# Altium PCB cereal-pcb.PcbDoc (part 1 of 2)
Units mil, origin at the board's own origin, x right, y up, seen from the top; angles counter-clockwise.
Board outline 894.17 x 955.43 mil, 4 copper layers (Top Layer, Signal Layer 1, Signal Layer 2, Bottom Layer), stack 22.048 mil thick; 42 components, 42 nets, 225 pads, 75 vias.
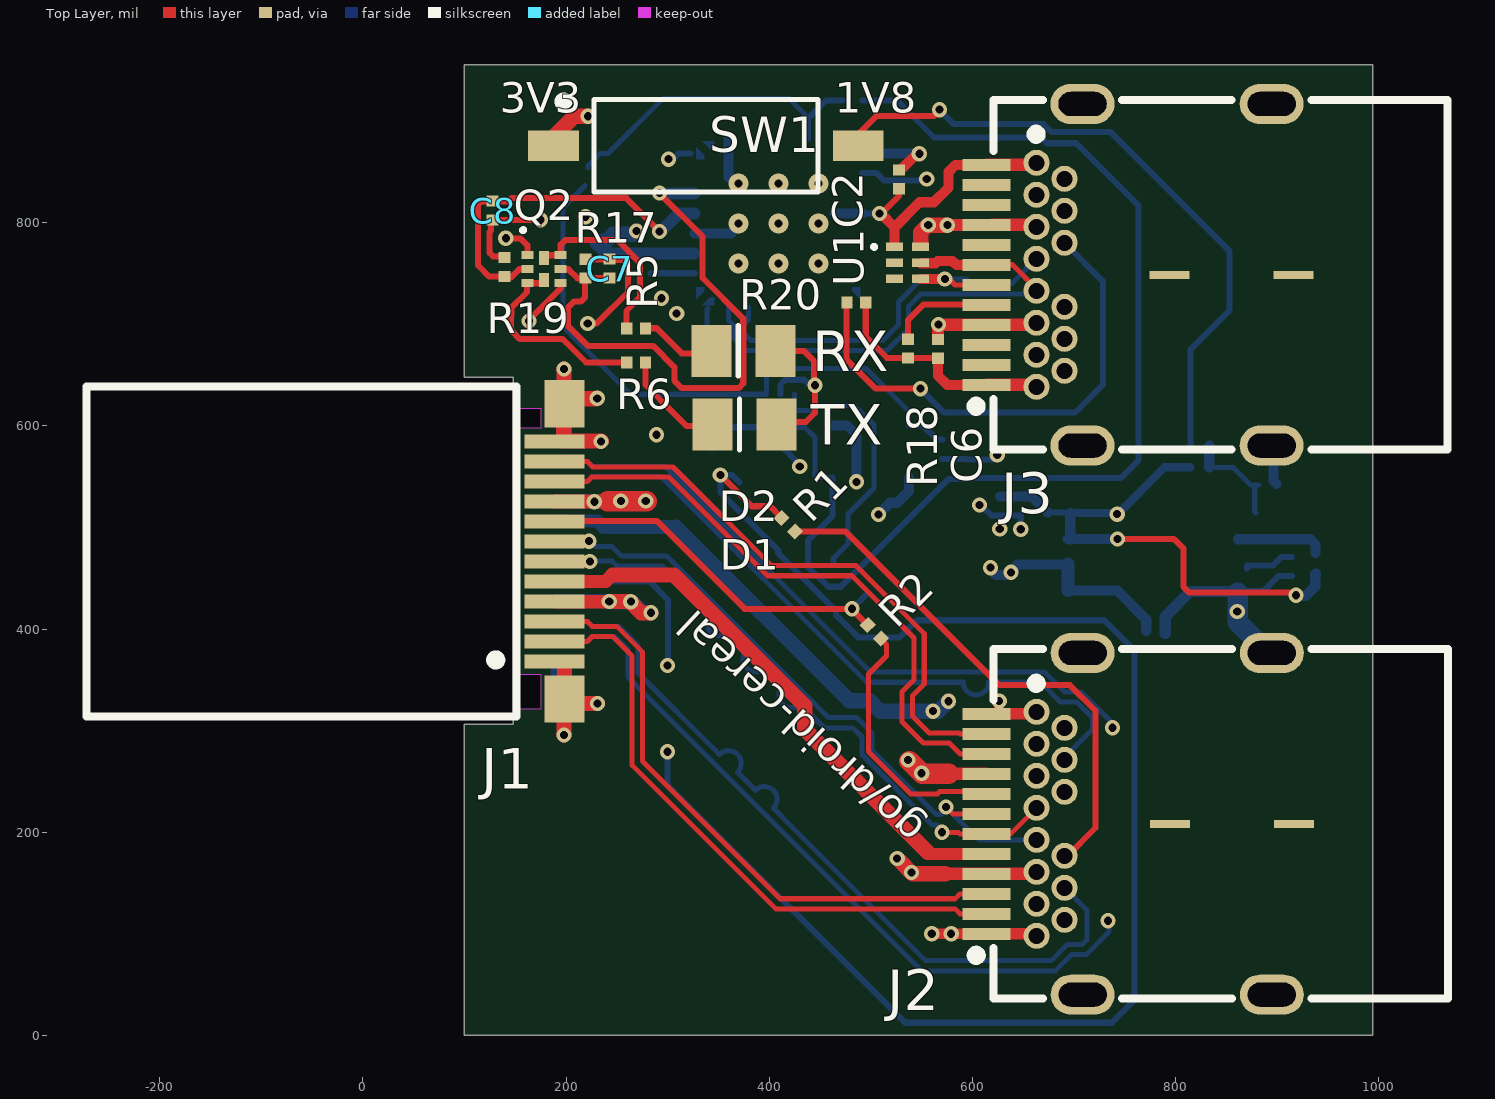
[diagram p0: Top Layer view]
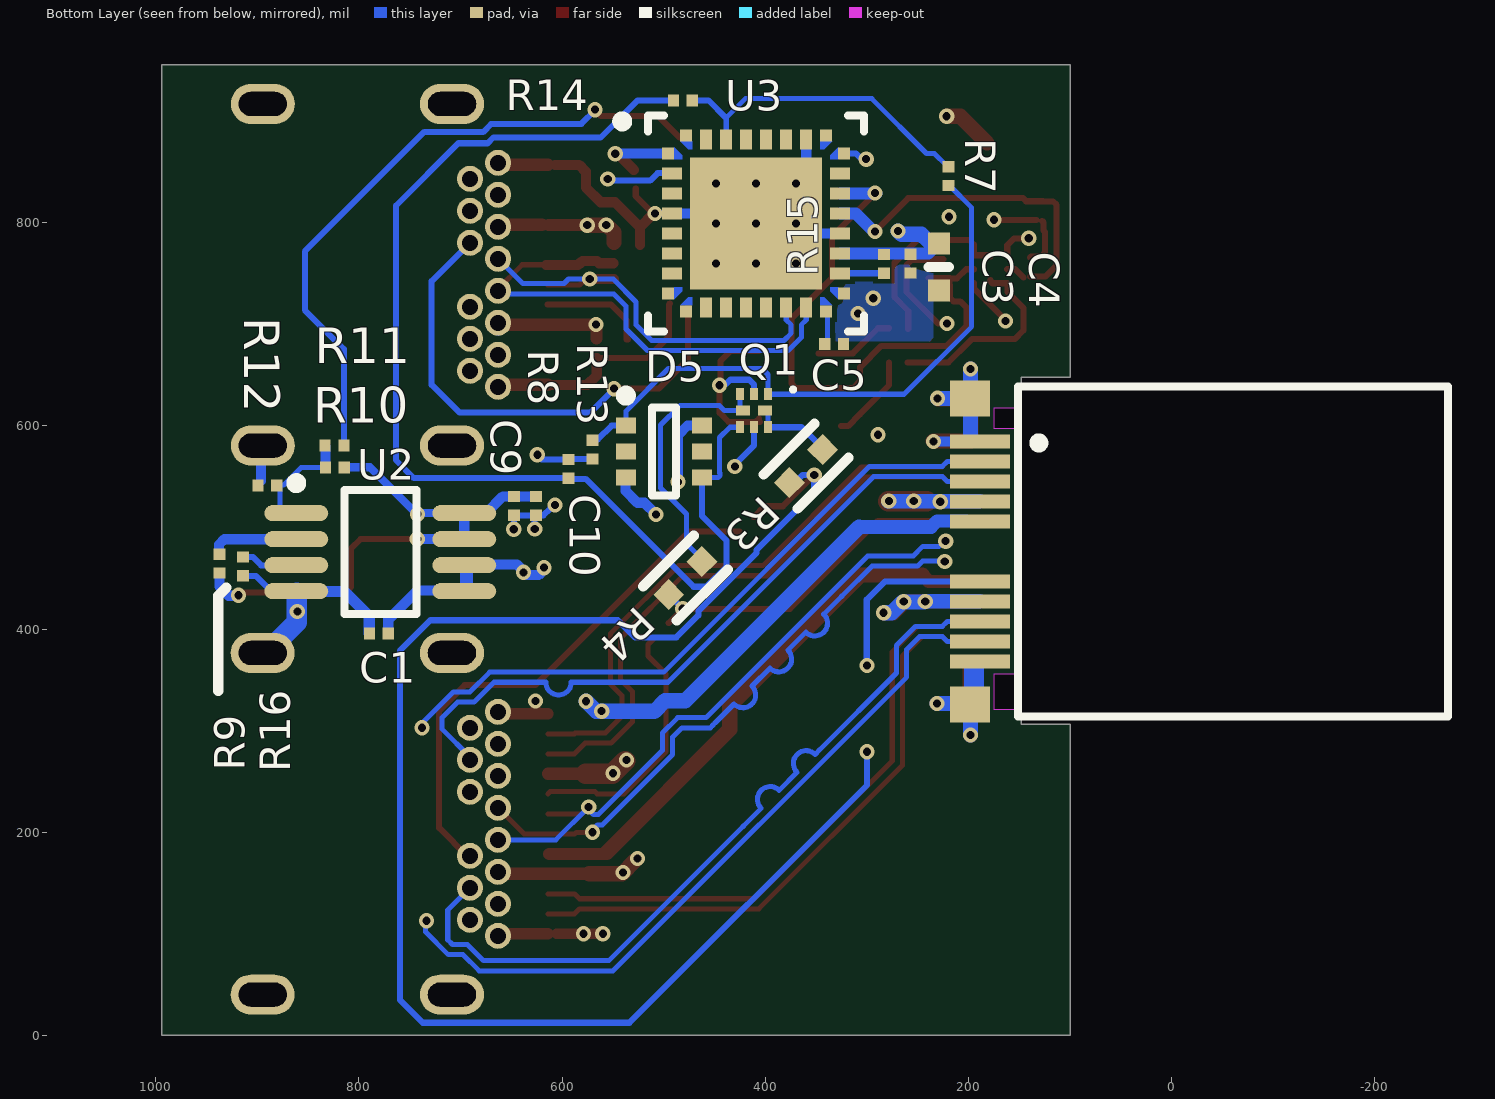
[diagram p1: Bottom Layer view, seen from below]
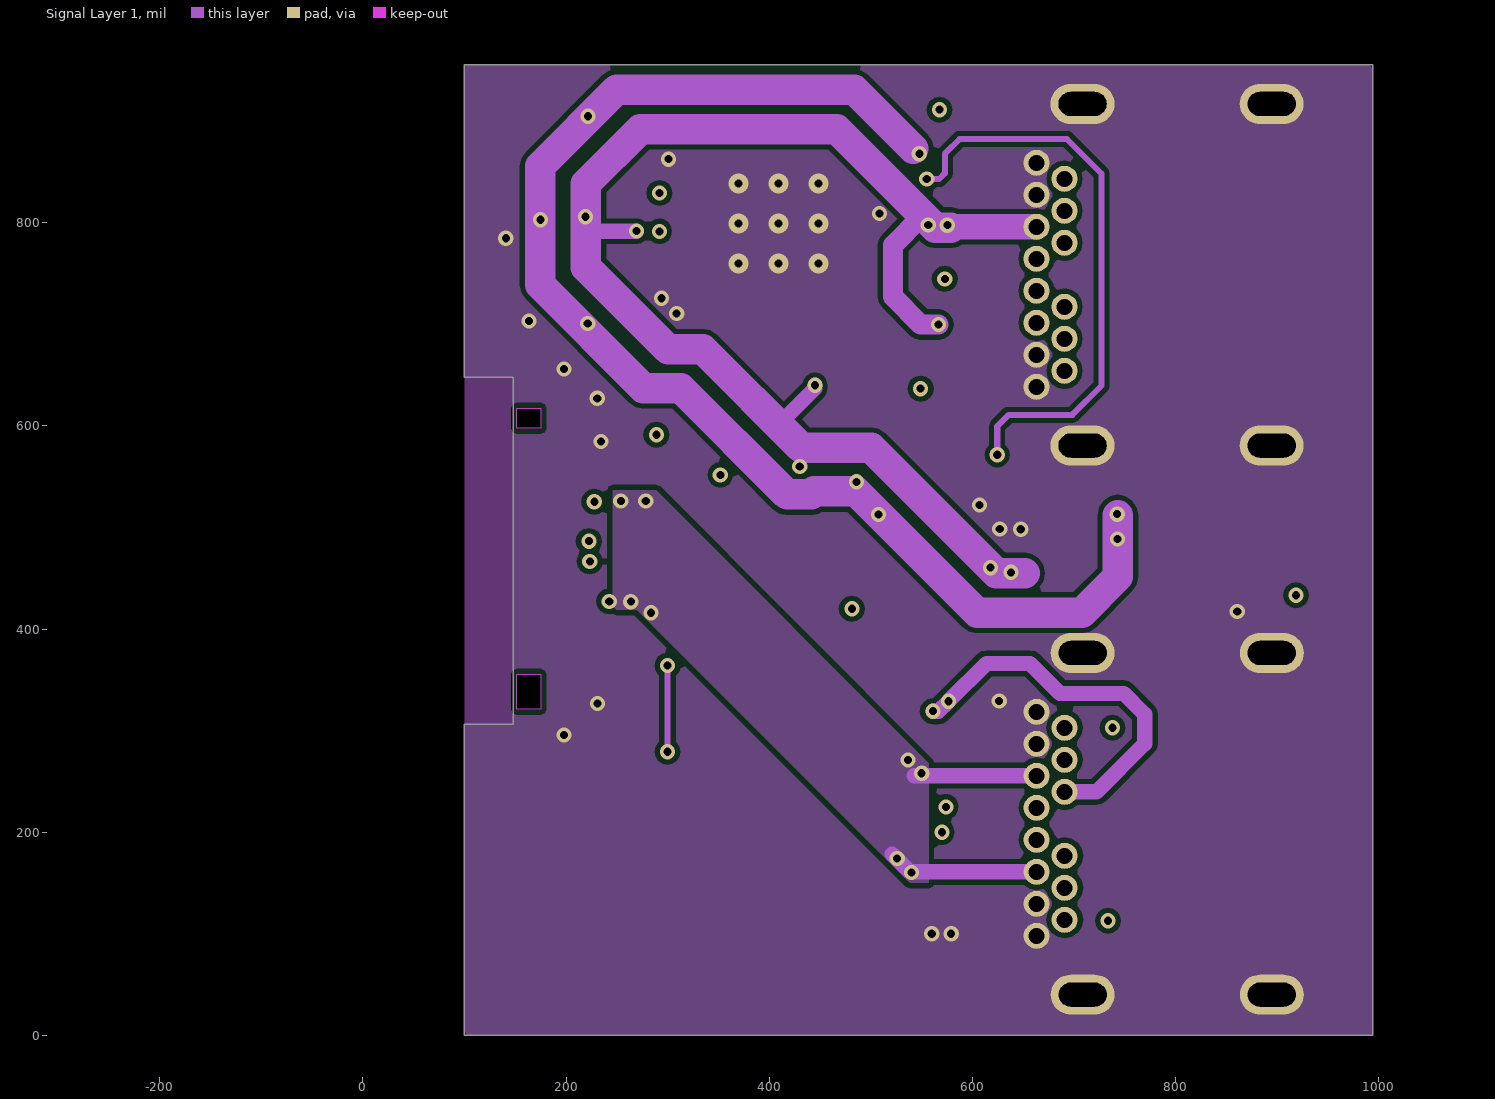
[diagram p2: Signal Layer 1]
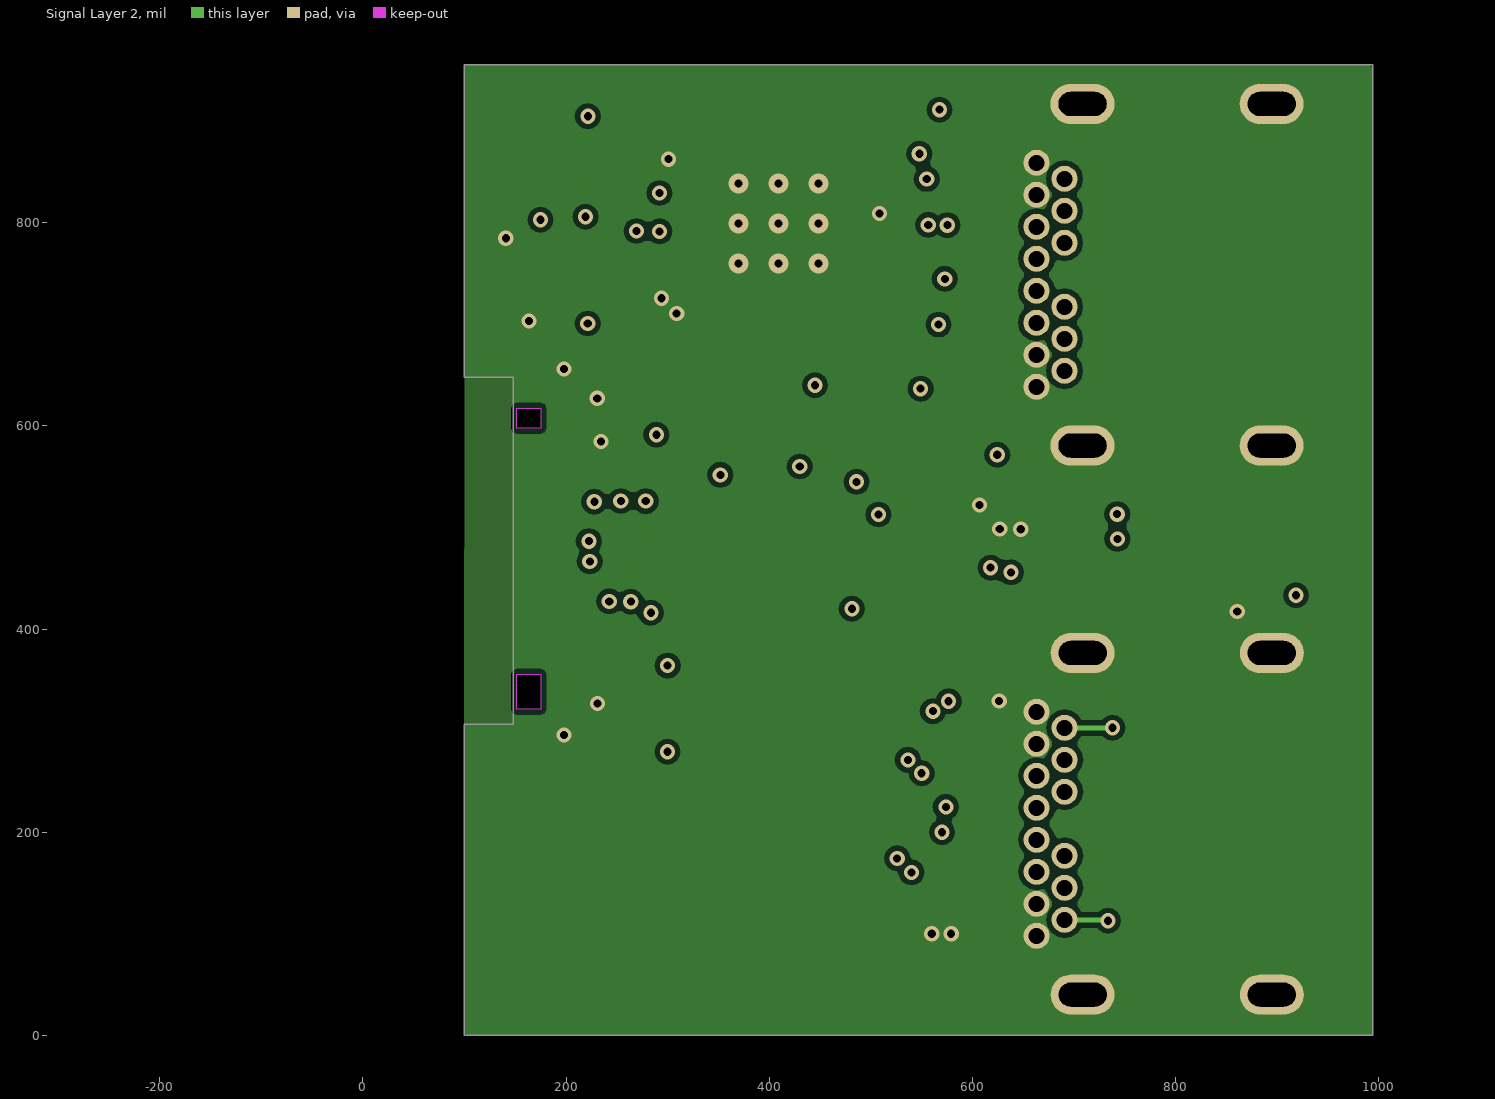
[diagram p3: Signal Layer 2]

## Layer stack, top to bottom
Top Solder: solder mask 0.4, Solder Resist, Dk 3.5
Top Layer: signal copper 1.378
Dielectric 1: prepreg 4.331, FR-4, Dk 4.2
Signal Layer 1: signal copper 1.378
FR-4: core 7.874, Dk 4.2
Signal Layer 2: signal copper 1.378
Dielectric 2: prepreg 4.331, Dk 4.2
Bottom Layer: signal copper 1.378
Bottom Solder: solder mask 0.4, Solder Resist, Dk 3.5

## Board outline
100,0 100,306.31 148.18,306.31 148.18,647.76 100,647.76 100,955.43 994.17,955.43 994.17,0

## Design rules (kind name [scope] priority, off if disabled: settings)
Clearance [All] p1: gap=5 ignorepadtopadclearanceinfootprint=FALSE
DiffPairsRouting [All] p1: maxlimit=10 minlimit=4 mostfreqgap=5 toplayer_minwidth=4 toplayer_maxwidth=15 toplayer_prefwidth=5 midlayer1_minwidth=4 midlayer1_maxwidth=15 midlayer1_prefwidth=5 midlayer2_minwidth=4 midlayer2_maxwidth=15 midlayer2_prefwidth=5 bottomlayer_minwidth=4 bottomlayer_maxwidth=15 bottomlayer_prefwidth=5 maxuncoupledlength=500
MinimumSolderMaskSliver [All] p1: minsoldermaskwidth=1
PolygonConnect [All] p1: connectstyle=Direct reliefconductorwidth=10 reliefentries=4 polygonreliefangle="90 Angle" airgapwidth=10
RoutingVias [All] p1: holewidth=28 width=50 viastyle="Through Hole" minholewidth=28 minwidth=50 maxholewidth=28 maxwidth=50
SilkToSilkClearance [All] p1: silktosilkclearance=1
SilkToSolderMaskClearance [IsPad] p1: minsilkscreentomaskgap=1 clearancetoexposedcopper=TRUE
SolderMaskExpansion [All] p1: expansion=4 istentingtop=FALSE
Width [All] p1: maxlimit=40 minlimit=4 preferedwidth=6
26 further rules are at their usual default settings.

## Classes and differential pairs
differential pair USBC_HS: +USBC_HS_P -USBC_HS_N
differential pair USB_FT_HS: +USB_FT_HS_P -USB_FT_HS_N
differential pair SSTX2: +SSTX2_P -SSTX2_N
differential pair SSTX1: +SSTX1_P -SSTX1_N
differential pair SSRX2: +SSRX2_P -SSRX2_N
differential pair SSRX1: +SSRX1_P -SSRX1_N

## Components (designator, comment, footprint, x,y, rotation, side; value= is the part's Value field where it differs from the comment)
C1 "1µF" SMD-0201C 780.39,395.57 r0 bottom
C2 "1µF" SMD-0201C 527.48,842.75 r270 top
C3 "0.10µF" SMD-0201C 257.16,759.62 r270 bottom
C4 "4.7µF" SMD-0402C 229.06,756.29 r180 bottom
C5 "0.10µF" SMD-0201C 332.17,680.81 r180 bottom
C6 "10000pF" SMD-0201C 565.93,675.89 r270 top
C7 "2.2µF" SMD-0201C 242.86,754.88 r270 top
C8 "2.2µF" SMD-0201C 127.66,812 r90 top
C9 "1µF" SMD-0201C 647.51,521.35 r270 bottom
C10 "1µF" SMD-0201C 625.52,521.3 r270 bottom
D1 "LTST-C171GKT" 0805 375.79,601.32 r180 top
D2 "LTST-C171KSKT" 0805 374.51,673.91 r180 top
D5 "MBD54DWT1" ONSC-SOT-363-6-419B-02_W_V 499.82,574.68 r180 bottom
J1 "632712000011" 632712000011 -26.7,476.47 r270 top
J2 "632723100011" 632723100011 835.8,208.37 r90 top
J3 "632723100011" 632723100011 835.69,748.76 r90 top
Q1 "PMDXB600UNEZ" NXP-SOT1216_N 411.05,615.11 r270 bottom
Q2 "PMDXB600UNEZ" NXP-SOT1216_N 178.33,754.22 r0 top
R1 "0.0" SMD-0201-RES 418.71,502.66 r315 top
R2 "0.0" SMD-0201-RES 503.5,397.37 r135 top
R3 "62" SMD-0402-RES 359.94,560.35 r225 bottom
R4 "62" SMD-0402-RES 478.75,450.18 r225 bottom
R5 "1k" SMD-0201-RES 268.92,696.1 r0 top
R6 "270" SMD-0201-RES 268.95,662.43 r0 top
R7 "0.0" SMD-0201-RES 219.93,845.81 r90 bottom
R8 "0.0" SMD-0201-RES 593.81,557.8 r90 bottom
R9 "53.6k" SMD-0201-RES 937.33,464.35 r270 bottom
R10 "53.6k" SMD-0201-RES 823.77,559.25 r180 bottom
R11 "22.1k" SMD-0201-RES 824.01,580.71 r180 bottom
R12 "30.1k" SMD-0201-RES 890.03,541.45 r180 bottom
R13 "0.0" SMD-0201-RES 569.98,576.54 r270 bottom
R14 "0.0" SMD-0201-RES 481.13,920.44 r180 bottom
R15 "30.1k" SMD-0201-RES 283.35,759.46 r270 bottom
R16 "0.0" SMD-0201-RES 914.32,461.84 r90 bottom
R17 "30.1k" SMD-0201-RES 219.28,754.83 r90 top
R18 "5.1k" SMD-0201-RES 536.52,676.06 r90 top
R19 "30.1k" SMD-0201-RES 139.47,756.44 r90 top
R20 "5.1k" SMD-0201-RES 485.7,721.66 r180 top
SW1 "416131160801" 416131160801 337.56,875.87 r270 top
U1 "ESDR0502NMUTAG" ONSC-UDFN-6-517AA-01_V 536.06,760.49 r0 top
U2 "TPS77401DGK" TI-DGK8_N 778.98,475.7 r180 bottom
U3 "FT232RQ-Reel" PQFN5X5-32_V 408.95,799.32 r180 bottom

## Footprints (in the part's own frame and the unit in brackets; to place one, negate y for a bottom-side part, rotate by r counter-clockwise, add the part's x,y. Pads: shape width x height; smd on the part's side, far side on the other; paste and mask are expansions set on the pad)
0805 [mm]
  rect 1x1.3 smd: 1(-0.8,0) 2(0.8,0)
  silkscreen extent 0.13,-0.64 0.13,0.64, body extent -1.07,-0.64 1.07,0.76, height 0.7
416131160801 [mm] "01p, 1.27mm Pitch, Horizontal, HP Type, SMT, flat Actuator, black, with Tape, T&R"
  rect 0.76x1.27 smd: 1(0,-3.81) 2(0,3.81)
  silkscreen extent -1.2,-3.66 1.15,2.8, body extent -1.15,-4 1.16,4, height 3.3
632712000011 [mm] "USB 3.1 Type C Plug Horizontal SMT"
  rect 0.35x1.5 smd: A1(2.75,5.475) A2(2.25,5.475) A3(1.75,5.475) A4(1.25,5.475) A5(0.75,5.475) A6(0.25,5.475) A7(-0.25,5.475) A8(-0.75,5.475) A9(-1.25,5.475) A10(-1.75,5.475) A11(-2.25,5.475) A12(-2.75,5.475)
  rect 0.35x1.5 smd far side: B1(-2.75,5.475) B2(-2.25,5.475) B3(-1.75,5.475) B4(-1.25,5.475) B5(-0.75,5.475) B8(0.75,5.475) B9(1.25,5.475) B10(1.75,5.475) B11(2.25,5.475) B12(2.75,5.475)
  rect 0.9x1 smd far side: Shell(-3.825,5.725) Shell(3.825,5.725)
  rect 1.18x1 smd: Shell(-3.69,5.725) Shell(3.69,5.725)
  Keep-Out Layer board cut-out: -3.08,5.125 -3.08,4.525 -3.58,4.525 -3.58,5.125
  Keep-Out Layer board cut-out: 3.945,5.125 3.945,4.525 3.075,4.525 3.075,5.125
  silkscreen extent -4.13,-6.23 4.13,4.52, body extent -5.13,-7.18 5.12,6.22, height 1.9
632723100011 [mm] "USB 3.1 Type C Receptacle Horizontal THR"
  rect 0.3x1.2 smd: A1(-2.75,5.635) A2(-2.25,5.635) A3(-1.75,5.635) A4(-1.25,5.635) A5(-0.75,5.635) A6(-0.25,5.635) A7(0.25,5.635) A8(0.75,5.635) A9(1.25,5.635) A10(1.75,5.635) A11(2.25,5.635) A12(2.75,5.635)
  round 0.65 hole 0.4: B1(2.8,4.385) B2(2.4,3.685) B3(1.6,3.685) B4(1.2,4.385) B5(0.8,3.685) B6(0.4,4.385) B7(-0.4,4.385) B8(-0.8,3.685) B9(-1.2,4.385) B10(-1.6,3.685) B11(-2.4,3.685) B12(-2.8,4.385) Shell(-2,4.385) Shell(2,4.385)
  oval 1x1.6 hole 0.6 slot 1.2 at 90 deg: Shell(-4.27,-1.495) Shell(-4.27,3.235) Shell(4.27,-1.495) Shell(4.27,3.235)
  rect 0.2x1 smd: ""(0,1.055) ""(0,-2.045)
  silkscreen extent -4.37,-5.89 4.37,6.01, body extent -4.37,-5.89 4.37,5.9, height 3.05
NXP-SOT1216_N [mm] "SON, 6-Leads, Body 1.15x1.05mm, Pitch 0.35mm, 2X Thermal Pad 0.35x0.25mm, IPC Medium Density"
  rect 0.3x0.2 smd: 1(-0.417,0.35) 2(-0.417,0) 3(-0.417,-0.35) 4(0.418,-0.35) 5(0.418,0) 6(0.418,0.35)
  rect 0.25x0.35 smd: 7(0,0.275) 8(0,-0.275)
  silkscreen extent -0.57,0.93 -0.47,1.02, body extent -0.52,-0.57 0.53,0.58, height 0.4
ONSC-SOT-363-6-419B-02_W_V [mm] "SOT23, 6-Leads, Body 2x1.25mm, Pitch 0.65mm"
  rect 0.5x0.4 smd: 1(-0.95,0.65) 2(-0.95,0) 3(-0.95,-0.65) 4(0.95,-0.65) 5(0.95,0) 6(0.95,0.65)
  silkscreen extent -1.08,-1.1 0.3,1.52, body extent -0.63,-1 0.63,1, height 1.1
ONSC-UDFN-6-517AA-01_V [mm] "SON, 6-Leads, Body 1.2x1mm, Pitch 0.4mm"
  rect 0.42x0.22 smd: 1(-0.325,0.4) 2(-0.325,0) 3(-0.325,-0.4) 4(0.325,-0.4) 5(0.325,0) 6(0.325,0.4)
  silkscreen extent -0.88,0.35 -0.78,0.45, body extent -0.5,-0.6 0.5,0.6, height 0.55
PQFN5X5-32_V [mm] "QFN, 32-Leads, Body 5x5mm, Pitch 0.5mm, Thermal Pad 3.3x3.3mm, FTDI Recommended"
  rect 0.3x0.3 smd paste-0.15 mask-0.15: 1(-2.2,1.75) 8(-2.2,-1.75) 9(-1.75,-2.2) 16(1.75,-2.2) 17(2.2,-1.75) 24(2.2,1.75) 25(1.75,2.2) 32(-1.75,2.2)
  rect 0.5x0.3 smd paste-0.15 mask+0.06: 2(-2.1,1.25) 3(-2.1,0.75) 4(-2.1,0.25) 5(-2.1,-0.25) 6(-2.1,-0.75) 7(-2.1,-1.25) 18(2.1,-1.25) 19(2.1,-0.75) 20(2.1,-0.25) 21(2.1,0.25) 22(2.1,0.75) 23(2.1,1.25)
  rect 0.3x0.5 smd paste-0.15 mask+0.06: 10(-1.25,-2.1) 11(-0.75,-2.1) 12(-0.25,-2.1) 13(0.25,-2.1) 14(0.75,-2.1) 15(1.25,-2.1) 26(1.25,2.1) 27(0.75,2.1) 28(0.25,2.1) 29(-0.25,2.1) 30(-0.75,2.1) 31(-1.25,2.1)
  rect 3.3x3.3 smd paste-1.65 mask+0.06: 33(0,0)
  Top Layer region: 1.6,-1.85 1.6,-2.05 1.9,-2.05 1.7,-1.85
  Top Layer region: -1.6,2.05 -1.6,1.85 -1.7,1.85 -1.9,2.05
  Top Layer region: 1.6,2.05 1.6,1.85 1.7,1.85 1.9,2.05
  Top Layer region: -1.6,-2.05 -1.6,-1.85 -1.7,-1.85 -1.9,-2.05
  Top Layer region: -2.05,1.6 -1.85,1.6 -1.85,1.7 -2.05,1.9
  Top Layer region: 2.05,1.6 1.85,1.6 1.85,1.7 2.05,1.9
  Top Layer region: 2.05,-1.6 1.85,-1.6 1.85,-1.7 2.05,-1.9
  Top Layer region: -2.05,-1.6 -1.85,-1.6 -1.85,-1.7 -2.05,-1.9
  silkscreen extent -3.47,-2.7 2.7,2.7, body extent -2.55,-2.55 2.55,2.55, height 1
SMD-0201-RES [mm] "SMD-0201-RES"
  rect 0.28x0.3 smd: 1(-0.235,0) 2(0.235,0)
  body extent -0.3,-0.15 0.3,0.15, height 0.3
SMD-0201C [mm] "SMD-0201"
  rect 0.28x0.3 smd: 1(-0.235,0) 2(0.235,0)
  body extent -0.3,-0.15 0.3,0.15, height 0.3
SMD-0402-RES [mm]
  rect 0.55x0.55 smd: 1(0,0.584) 2(0,-0.584)
  silkscreen extent -0.6,-0.9 0.6,0.9, body extent -0.27,-0.57 0.28,0.58, height 0.41
SMD-0402C [mm]
  rect 0.55x0.55 smd: 1(0,0.584) 2(0,-0.584)
  silkscreen extent -0.25,0 0.25,0, body extent -0.25,-0.51 0.25,0.51, height 0.51
TI-DGK8_N [mm] "SOP, 8-Leads, Body 3x3mm, Pitch 0.65mm, IPC Medium Density"
  oval 1.6x0.4 smd: 1(-2.1,0.975) 2(-2.1,0.325) 3(-2.1,-0.325) 4(-2.1,-0.975) 5(2.1,-0.975) 6(2.1,-0.325) 7(2.1,0.325) 8(2.1,0.975)
  silkscreen extent -2.23,-1.55 0.9,1.85, body extent -1.55,-1.55 1.55,1.55, height 1.1

## Part data
C1 C2 C9 C10: library part GRM033R60J105MEA2D, "CAP CER 1UF 6.3V X5R 0201", Digi-Key Part Number=490-7229-1-ND, Manufacturer="Murata Electronics North America", Operating Temperature="-55°C ~ 85°C", Package / Case="0.024\" L x 0.012\" W (0.60mm x 0.30mm)", Ratings=-, Temperature Coefficient=X5R, Tolerance=±20%, Voltage=6.3V, @ qty=0, Applications="General Purpose", Datasheets=http://www.murata.com/~/media/webrenewal/support/library/catalog/products/capacitor/mlcc/c02e.pdf, Factory Stock=0, Failure Rate="Surface Mount, MLCC", Features="Derating Recommended", Height - Seated (Max)="0.013\" (0.33mm)", Image=//media.digikey.com/Renders/Murata%20Renders/ZRB-SERIES-0402.jpg, Lead Spacing=-, Minimum Quantity=1, Mounting Type="0201 (0603 Metric)", Packaging="Cut Tape (CT)", Part Number=GRM033R60J105MEA2D, Part Status=Active, Quantity Available=223818, Series=GRM, Size / Dimension=-, Thickness (Max)=-, Unit Price (USD)=0.12
C3 C5: library part GRM033R61A104KE15D, "CAP CER 0.1UF 10V X5R 0201", Digi-Key Part Number=490-5881-1-ND, Manufacturer="Murata Electronics North America", Operating Temperature="-55°C ~ 85°C", Package / Case="0.024\" L x 0.012\" W (0.60mm x 0.30mm)", Ratings=-, Temperature Coefficient=X5R, Tolerance=±10%, Voltage=10V, @ qty=0, Applications="General Purpose", Datasheets=http://www.murata.com/~/media/webrenewal/support/library/catalog/products/capacitor/mlcc/c02e.pdf, Factory Stock=0, Failure Rate="Surface Mount, MLCC", Features=-, Height - Seated (Max)="0.013\" (0.33mm)", Image=//media.digikey.com/Renders/Murata%20Renders/ZRB-SERIES-0402.jpg, Lead Spacing=-, Minimum Quantity=1, Mounting Type="0201 (0603 Metric)", Packaging="Cut Tape (CT)", Part Number=GRM033R61A104KE15D, Part Status=Active, Quantity Available=6540866, Series=GRM, Size / Dimension=-, Thickness (Max)=-, Unit Price (USD)=0.1
C4: library part GRM153R60G475ME15D, "CAP CER 4.7UF 4V X5R 0402", Digi-Key Part Number=490-13231-1-ND, Manufacturer="Murata Electronics North America", Operating Temperature="-55°C ~ 85°C", Package / Case="0402 (1005 Metric)", Ratings=-, Temperature Coefficient=X5R, Tolerance=±20%, Voltage=4V, @ qty=0, Applications="General Purpose", Datasheets=http://psearch.en.murata.com/capacitor/product/GRM153R60G475ME15%23.pdf, Factory Stock=0, Features=-, Height - Seated (Max)=-, Image=//media.digikey.com/Renders/Murata%20Renders/ZRB-SERIES-0402.jpg, Lead Spacing=-, Lead Style=-, Minimum Quantity=1, Mounting Type="Surface Mount, MLCC", Packaging="Cut Tape (CT)", Part Number=GRM153R60G475ME15D, Part Status=Active, Quantity Available=9100, Series=GRM, Size / Dimension="0.039\" L x 0.020\" W (1.00mm x 0.50mm)", Thickness (Max)="0.013\" (0.33mm)", Unit Price (USD)=0.27
C6: library part GRM033R61A103KA01J, "CAP CER 10000PF 10V X5R 0201", Digi-Key Part Number=490-8156-1-ND, Manufacturer="Murata Electronics North America", Operating Temperature="-55°C ~ 85°C", Package / Case="0.024\" L x 0.012\" W (0.60mm x 0.30mm)", Ratings=-, Temperature Coefficient=X5R, Tolerance=±10%, Voltage=10V, @ qty=0, Applications="General Purpose", Datasheets=http://www.murata.com/~/media/webrenewal/support/library/catalog/products/capacitor/mlcc/c02e.pdf, Factory Stock=0, Failure Rate="Surface Mount, MLCC", Features=-, Height - Seated (Max)="0.013\" (0.33mm)", Image=//media.digikey.com/Renders/Murata%20Renders/ZRB-SERIES-0402.jpg, Lead Spacing=-, Minimum Quantity=1, Mounting Type="0201 (0603 Metric)", Packaging="Cut Tape (CT)", Part Number=GRM033R61A103KA01J, Part Status=Active, Quantity Available=134975, Series=GRM, Size / Dimension=-, Thickness (Max)=-, Unit Price (USD)=0.1
C7 C8: library part GRM033R61A225KE47D, "CAP CER 2.2UF 10V X5R 0201", Digi-Key Part Number=490-13227-1-ND, Manufacturer="Murata Electronics North America", Operating Temperature="-55°C ~ 85°C", Package / Case="0.024\" L x 0.012\" W (0.60mm x 0.30mm)", Ratings=-, Temperature Coefficient=X5R, Tolerance=±10%, Voltage=10V, @ qty=0, Applications="General Purpose", Datasheets=http://www.murata.com/~/media/webrenewal/support/library/catalog/products/capacitor/mlcc/c02e.pdf, Factory Stock=0, Failure Rate="Surface Mount, MLCC", Features="Derating Recommended", Height - Seated (Max)="0.015\" (0.39mm)", Image=//media.digikey.com/Renders/Murata%20Renders/ZRB-SERIES-0402.jpg, Lead Spacing=-, Minimum Quantity=1, Mounting Type="0201 (0603 Metric)", Packaging="Cut Tape (CT)", Part Number=GRM033R61A225KE47D, Part Status=Active, Quantity Available=8, Series=GRM, Size / Dimension=-, Thickness (Max)=-, Unit Price (USD)=0.28
D1: "LED", Color=Green
D2: "LED", Color=Yellow
D5: "Dual Schottky Barrier Diodes, 6-Pin SOT-363, Tape and Reel", Manufacturer="On Semiconductor", Supplier Part Number 1=MBD54DWT1OSCT-ND, ComponentLink1Description="Manufacturer URL", ComponentLink1URL=http://www.onsemi.com/, ComponentLink2Description=Datasheet, ComponentLink2URL=http://www.onsemi.cn/pub_link/Collateral/MBD54DWT1-D.PDF, ComponentLink3Description="Package Specification", ComponentLink3URL=http://www.onsemi.com/pub_link/Collateral/NTJD4001N-D.PDF, Configuration=Dual, DatasheetVersion="Rev. 7", IFSM Max (A)=0.6, Mounting Technology="Surface Mount", PackageDescription="6-Pin Small Outline Transistor, Body 2 x 1.25 mm, Pitch 0.65 mm", PackageReference=SOT-363-6-419B-02_W, PackageVersion="Rev. W, 01/2006", Packing="Tape and Reel", PartNumber=MBD54DWT1, RoHS=FALSE, Supplier 1=Digi-Key, trr Max (ns)=5
J1: "USB 3.1 Type C Plug Horizontal SMT WR-COM", ComponentLink1Description=Manufacturer, ComponentLink1URL=http://www.we-online.de, ComponentLink2Description=Datasheet, ComponentLink2URL=http://katalog.we-online.de/em/datasheet/632712000011.pdf, Construction=SMT, Gender=Plug, Interface Type="Type C", Part Number=632712000011, Published Date="April 2017", Publisher="Wurth Elektronik", Sub-Family="USB 3.1", Type=Horizontal
J2 J3: "USB 3.1 Type C Receptacle Horizontal THR WR-COM", ComponentLink1Description=Manufacturer, ComponentLink1URL=http://www.we-online.de, ComponentLink2Description=Datasheet, ComponentLink2URL=http://katalog.we-online.de/em/datasheet/632723x00011.pdf, Construction=THR, Gender=Receptacle, Interface Type="Type C", Part Number=632723100011, Published Date="April 2017", Publisher="Wurth Elektronik", Sub-Family="USB 3.1", Type=Horizontal
Q1 Q2: "Dual N-Channel Trench MOSFET, 20 V, 0.6 A, -55 to 150 degC, 8-Pin SOT1216", Manufacturer="NXP Semiconductors", Supplier Part Number 1=PMDXB600UNEZ-ND, Channel Type=N, Ciss [typ] (pF)=21.3, ComponentLink1Description="Manufacturer URL", ComponentLink1URL=http://www.nxp.com/, ComponentLink2Description=Datasheet, ComponentLink2URL=http://www.nxp.com/documents/data_sheet/PMDXB600UNE.pdf, ComponentLink3Description="Package Specification", ComponentLink3URL=http://www.nxp.com/documents/outline_drawing/sot1216_po.pdf, Coss [typ] (pF)=5.4, DatasheetVersion="Rev. 1", ID [max] (A)=0.6, Mounting Technology="Surface Mount", PackageDescription="6-Pin Small Outline No-Lead, Body 1.1 x 1 mm, Pitch 0.35 mm", PackageReference=SOT1216, PackageVersion="13-03-06, 03/2013", PartNumber=PMDXB600UNEZ, Supplier 1=Digi-Key, Supplier 2=Newark, Supplier 3=Mouser, Supplier Part Number 2=23X8428, Supplier Part Number 3=771-PMDXB600UNEZ, VDS [max] (V)=20, VGSth [typ] (V)=0.7
R1 R2 R7 R8 R13 R14 R16: library part ERJ-1GN0R00C, "RES SMD 0.0OHM JUMPER 1/20W 0201", Digi-Key Part Number=P15979CT-ND, Manufacturer="Panasonic Electronic Components", Operating Temperature="-55°C ~ 125°C", Package / Case="0201 (0603 Metric)", Power (Watts)="0.05W, 1/20W", Supplier Device Package=0201, Temperature Coefficient=-, Tolerance=Jumper, @ qty=1500, Composition="Thick Film", Datasheets=http://industrial.panasonic.com/www-cgi/jvcr13pz.cgi?E+PZ+3+AOA0001+ERJ1GN0R00C+8+WW, Factory Stock=0, Failure Rate=-, Features="Automotive AEC-Q200", Height - Seated (Max)="0.010\" (0.26mm)", Image=//media.digikey.com/Renders/Panasonic%20Renders/ERJ-0201%20Pkg.jpg, Minimum Quantity=1, Number of Terminations=2, Packaging="Cut Tape (CT)", Part Number=ERJ-1GN0R00C, Part Status=Active, Quantity Available=1815300, Series=ERJ, Size / Dimension="0.024\" L x 0.012\" W (0.60mm x 0.30mm)", Unit Price (USD)=0.00864
  R13 R14: Populate=DNS
R3 R4: library part ERJ-2GEJ620X, "RES SMD 62 OHM 5% 1/10W 0402", Digi-Key Part Number=P62JCT-ND, Manufacturer="Panasonic Electronic Components", Operating Temperature="-55°C ~ 155°C", Package / Case="0402 (1005 Metric)", Power (Watts)="0.1W, 1/10W", Supplier Device Package=0402, Temperature Coefficient=±200ppm/°C, Tolerance=±5%, @ qty=1500, Composition="Thick Film", Datasheets=http://industrial.panasonic.com/www-cgi/jvcr13pz.cgi?E+PZ+3+AOA0001+ERJ2GEJ620X+7+WW, Factory Stock=0, Failure Rate=-, Features="Automotive AEC-Q200", Height - Seated (Max)="0.016\" (0.40mm)", Image=//media.digikey.com/Photos/Panasonic%20Photos/ERJ-PA2-Series.jpg, Minimum Quantity=1, Number of Terminations=2, Packaging="Cut Tape (CT)", Part Number=ERJ-2GEJ620X, Part Status=Active, Quantity Available=429144, Series=ERJ, Size / Dimension="0.039\" L x 0.020\" W (1.00mm x 0.50mm)", Unit Price (USD)=0.00350
R5: library part ERJ-1GEF1001C, "RES SMD 1K OHM 1% 1/20W 0201", Digi-Key Part Number=P1.00KABCT-ND, Manufacturer="Panasonic Electronic Components", Operating Temperature="-55°C ~ 125°C", Package / Case="0201 (0603 Metric)", Power (Watts)="0.05W, 1/20W", Supplier Device Package=0201, Temperature Coefficient=±200ppm/°C, Tolerance=±1%, @ qty=1500, Composition="Thick Film", Datasheets=//media.digikey.com/pdf/Data%20Sheets/Panasonic%20Resistors%20Thermistors%20PDFs/ERJ_G,R,E_Rev08.pdf, Factory Stock=0, Failure Rate=-, Features=-, Height - Seated (Max)="0.010\" (0.26mm)", Image=//media.digikey.com/Renders/Panasonic%20Renders/ERJ-0201%20Pkg.jpg, Minimum Quantity=1, Number of Terminations=2, Packaging="Cut Tape (CT)", Part Number=ERJ-1GEF1001C, Part Status=Active, Quantity Available=359548, Series=ERJ, Size / Dimension="0.024\" L x 0.012\" W (0.60mm x 0.30mm)", Unit Price (USD)=0.00933
R6: library part ERJ-1GEF2700C, "RES SMD 270 OHM 1% 1/20W 0201", Digi-Key Part Number=P270ABCT-ND, Manufacturer="Panasonic Electronic Components", Operating Temperature="-55°C ~ 125°C", Package / Case="0201 (0603 Metric)", Power (Watts)="0.05W, 1/20W", Supplier Device Package=0201, Temperature Coefficient=±200ppm/°C, Tolerance=±1%, @ qty=1500, Composition="Thick Film", Datasheets=//media.digikey.com/pdf/Data%20Sheets/Panasonic%20Resistors%20Thermistors%20PDFs/ERJ_G,R,E_Rev08.pdf, Factory Stock=0, Failure Rate=-, Features=-, Height - Seated (Max)="0.010\" (0.26mm)", Image=//media.digikey.com/Renders/Panasonic%20Renders/ERJ-0201%20Pkg.jpg, Minimum Quantity=1, Number of Terminations=2, Packaging="Cut Tape (CT)", Part Number=ERJ-1GEF2700C, Part Status=Active, Quantity Available=19115, Series=ERJ, Size / Dimension="0.024\" L x 0.012\" W (0.60mm x 0.30mm)", Unit Price (USD)=0.00933
R9 R10: library part ERJ-1GEF5362C, "RES SMD 53.6K OHM 1% 1/20W 0201", Digi-Key Part Number=P53.6KABCT-ND, Manufacturer="Panasonic Electronic Components", Operating Temperature="-55°C ~ 125°C", Package / Case="0201 (0603 Metric)", Power (Watts)="0.05W, 1/20W", Supplier Device Package=0201, Temperature Coefficient=±200ppm/°C, Tolerance=±1%, @ qty=1500, Composition="Thick Film", Datasheets=//media.digikey.com/pdf/Data%20Sheets/Panasonic%20Resistors%20Thermistors%20PDFs/ERJ_G,R,E_Rev08.pdf, Factory Stock=0, Failure Rate=-, Features=-, Height - Seated (Max)="0.010\" (0.26mm)", Image=//media.digikey.com/Renders/Panasonic%20Renders/ERJ-0201%20Pkg.jpg, Minimum Quantity=1, Number of Terminations=2, Packaging="Cut Tape (CT)", Part Number=ERJ-1GEF5362C, Part Status=Active, Quantity Available=73542, Series=ERJ, Size / Dimension="0.024\" L x 0.012\" W (0.60mm x 0.30mm)", Unit Price (USD)=0.00933
R11: library part ERJ-1GEF2212C, "RES SMD 22.1K OHM 1% 1/20W 0201", Digi-Key Part Number=P22.1KABCT-ND, Manufacturer="Panasonic Electronic Components", Operating Temperature="-55°C ~ 125°C", Package / Case="0201 (0603 Metric)", Power (Watts)="0.05W, 1/20W", Supplier Device Package=0201, Temperature Coefficient=±200ppm/°C, Tolerance=±1%, @ qty=1500, Composition="Thick Film", Datasheets=//media.digikey.com/pdf/Data%20Sheets/Panasonic%20Resistors%20Thermistors%20PDFs/ERJ_G,R,E_Rev08.pdf, Factory Stock=0, Failure Rate=-, Features=-, Height - Seated (Max)="0.010\" (0.26mm)", Image=//media.digikey.com/Renders/Panasonic%20Renders/ERJ-0201%20Pkg.jpg, Minimum Quantity=1, Number of Terminations=2, Packaging="Cut Tape (CT)", Part Number=ERJ-1GEF2212C, Part Status=Active, Quantity Available=91674, Series=ERJ, Size / Dimension="0.024\" L x 0.012\" W (0.60mm x 0.30mm)", Unit Price (USD)=0.00933
R12 R15 R17 R19: library part ERJ-1GEF3012C, "RES SMD 30.1K OHM 1% 1/20W 0201", Digi-Key Part Number=P30.1KABCT-ND, Manufacturer="Panasonic Electronic Components", Operating Temperature="-55°C ~ 125°C", Package / Case="0201 (0603 Metric)", Power (Watts)="0.05W, 1/20W", Supplier Device Package=0201, Temperature Coefficient=±200ppm/°C, Tolerance=±1%, @ qty=1500, Composition="Thick Film", Datasheets=//media.digikey.com/pdf/Data%20Sheets/Panasonic%20Resistors%20Thermistors%20PDFs/ERJ_G,R,E_Rev08.pdf, Factory Stock=0, Failure Rate=-, Features=-, Height - Seated (Max)="0.010\" (0.26mm)", Image=//media.digikey.com/Renders/Panasonic%20Renders/ERJ-0201%20Pkg.jpg, Minimum Quantity=1, Number of Terminations=2, Packaging="Cut Tape (CT)", Part Number=ERJ-1GEF3012C, Part Status=Active, Quantity Available=121183, Series=ERJ, Size / Dimension="0.024\" L x 0.012\" W (0.60mm x 0.30mm)", Unit Price (USD)=0.00933
R18 R20: library part ERJ-1GEF5101C, "RES SMD 5.1K OHM 1% 1/20W 0201", Digi-Key Part Number=P5.10KABCT-ND, Manufacturer="Panasonic Electronic Components", Operating Temperature="-55°C ~ 125°C", Package / Case="0201 (0603 Metric)", Power (Watts)="0.05W, 1/20W", Supplier Device Package=0201, Temperature Coefficient=±200ppm/°C, Tolerance=±1%, @ qty=1500, Composition="Thick Film", Datasheets=//media.digikey.com/pdf/Data%20Sheets/Panasonic%20Resistors%20Thermistors%20PDFs/ERJ_G,R,E_Rev08.pdf, Factory Stock=0, Failure Rate=-, Features=-, Height - Seated (Max)="0.010\" (0.26mm)", Image=//media.digikey.com/Renders/Panasonic%20Renders/ERJ-0201%20Pkg.jpg, Minimum Quantity=1, Number of Terminations=2, Packaging="Cut Tape (CT)", Part Number=ERJ-1GEF5101C, Part Status=Active, Quantity Available=106914, Series=ERJ, Size / Dimension="0.024\" L x 0.012\" W (0.60mm x 0.30mm)", Unit Price (USD)=0.00933
SW1: "WS-DISV 1.27 mm small compact SMD Dip Switch with top tape", ComponentLink1Description="Manufacturer URL", ComponentLink1URL=http://www.we-online.com, ComponentLink2Description=Datasheet, ComponentLink2URL=http://katalog.we-online.de/em/datasheet/4161311608xx.pdf, NoPins=02, PackageReference=416131160801, PartNumber=416131160801
U1: "Ultra Low Capacitance ESD Protection Array for High Speed Data Line Protection, 6-Pin UDFN, Pb-Free, Tape and Reel", Manufacturer="On Semiconductor", Supplier Part Number 1=92T2061, C Max (pF)=0.6, ComponentLink1Description="Manufacturer URL", ComponentLink1URL=http://www.onsemi.com/, ComponentLink2Description=Datasheet, ComponentLink2URL=http://www.onsemi.cn/pub_link/Collateral/ESDR0502N-D.PDF, ComponentLink3Description="Package Specification", ComponentLink3URL=http://www.onsemi.com/pub_link/Collateral/517AA.PDF, DatasheetVersion="Rev. 4", Direction=Unidirectional, IR Max (uA)=1, Mounting Technology="Surface Mount", Number of Lines=4, PackageDescription="6-Pin Small Outline No-Lead, Body 1.2 x 1 mm, Pitch 0.4 mm", PackageReference=UDFN-6-517AA-01, PackageVersion="Rev. D, 09/2010", Packing="Tape and Reel", PartNumber=ESDR0502NMUTAG, PPK Max (W)=100, RoHS=Pb-Free, Supplier 1=Newark, Supplier 2=Mouser, Supplier Part Number 2=863-ESDR0502NMUTAG, V(BR) Min (V)=6, VRWM Max (V)=5.5
U2: "Single Output Fast Transient Response LDO, 250 mA, Adjustable 1.5 to 5.5 V Output, 2.7 to 10 V Input, with Power Good Output, 8-pin MSOP (DGK), -40 to 125 degC, Green (RoHS & no Sb/Br)", Manufacturer="Texas Instruments", Power Good=TRUE, Supplier Part Number 1=296-8115-5-ND, Accuracy(%)=2, Code_JEDEC=MO-187, ComponentLink1Description="Manufacturer URL", ComponentLink1URL=http://www.ti.com/, ComponentLink2Description=Datasheet, ComponentLink2URL=http://www.ti.com/general/docs/lit/getliterature.tsp?genericPartNumber=TPS77401&fileType=pdf, ComponentLink3Description="Package Specification", ComponentLink3URL=http://www.ti.com/litv/pdf/mpds028d, DatasheetVersion=SLVS281E, Eco-Plan="Green (RoHS & no Sb/Br)", Iout(Max)(A)=0.25, Iq(Typ)(mA)=0.09, Mounting Technology="Surface Mount", PackageDescription="8-Pin Thin Small Outline Package 3 x 3 mm Body ,0.65 mm Pitch", PackageReference=DGK8, PackageVersion=4073329/E, PartNumber=TPS77401DGK, SubFamily="Single Channel LDO", Supplier 1=Digi-Key, Supplier 2=Newark, Supplier 3=Mouser, Supplier Part Number 2=77C1228, Supplier Part Number 3=595-TPS77401DGK, Vdo(Typ)(mV)=200, Vin(Max)(V)=10, Vin(Min)(V)=2.7, Vout Adj(Max)(V)=5.5, Vout Adj(Min)(V)=1.5
U3: "USB UART Asynchronous Serial Data Transfer Chip, 32-pin QFN, Tape and Reel", Manufacturer=FTDI, ComponentLink1Description="Manufacturer URL", ComponentLink1URL=http://www.ftdichip.com/, ComponentLink2Description=Datasheet, ComponentLink2URL=http://www.ftdichip.com/Support/Documents/DataSheets/ICs/DS_FT232R.pdf, DatasheetVersion="ver 2.10, Mar-2012", PackageDescription="32-Pin Quad Flat No-Lead 0.5 mm Pitch, Pullback, 3.2 x 3.2 mm Exposed Pad", PackageReference=PQFN5X5-32, PackageVersion=Mar-12, PartNumber=FT232RQ-Reel

## Via types
v1: diameter 15, hole 8, Top Layer to Bottom Layer, tented both sides, 66 vias
v2: diameter 19.68, hole 7.87, Top Layer to Bottom Layer, tented bottom, 9 vias

## Nets (pads, with @x,y where several pads share a name; then routed paths per layer and width w, separated by ;. In a path a pad name is that pad's centre, name@x,y a point inside that pad or via, vN(x,y) a via of type N, cw(c..) or ccw(c..) an arc to the next point about the centre after c; other vN are vias at no path point)
CC1: J1.A5 J2.A5 | length 552.8
  Top Layer w12: 557.14,180.18 558.67,178.65 J2.A5@612.71,178.65
  Top Layer w13: J1.A5 239.26,446.94 245.64,453.32
  Top Layer w15: 245.64,453.32 306.17,453.32 435.04,324.46 435.04,301.18 556.04,180.18
CC2: J1.B5 J2.B5 | length 831.9
  Signal Layer 1 w15: v1(561.08,319.22) 566.63,319.22 v1@576.24,328.82 ; v1(576.53,329.02) 613.69,366.18 656.75,366.18 686.27,336.66 748.95,336.66 769.46,316.15 769.46,287.15 722.11,239.8 J2.B5@691.6,239.8
  Bottom Layer w13: J1.B5@202.31,506.28 231.06,506.28 236.96,500.38
  Bottom Layer w14: 236.96,500.38 307.86,500.38
  Bottom Layer w15: 307.86,500.38 478.72,329.52 498.78,329.52 509.24,319.07 v1@561.08,319.07 ; v1(561.08,319.22) 566.65,319.22 v1@576.49,329.06 ; v1@565.02,319.07 v1@566.47,319.07
DBG_CC1: J3.A5 R18.2 | length 102.9
  Top Layer w6: R18.2 536.52,704.14 551.78,719.4 J3.A5@614.3,719.4
DBG_CC2: J3.B5 R20.2 | length 496.3
  Top Layer w6: R20.2@475.94,721.43 475.94,665.57 504.84,636.67 v1(548.92,636.67)
  Bottom Layer w6: v1@549.21,636.24 572.4,613.05 700.9,613.05 728.35,640.5 728.35,742.51 J3.B5
DBG_VBUS: C1.1 C3.1 C4.1 C6.1 D1.1 D2.1 J3.A4 J3.A9 J3.B4 J3.B9 Q1.2 Q1.5 R15.1 U1.6 U2.5 U2.6 U3.19 | length 2217.9
  Top Layer w6: D1.1@405.3,603.81 436.08,603.81 445,612.73 v1(445,640) ; D1.1@406.01,607.24 D1.1@408.17,605.08 ; D2.1 433.9,673.91 444.13,663.68 v1@444.13,639.06 ; v1@556.1,798.03 v1@556.54,797.6 ; v1@566,699.8 566.25,700.05 v1(566.54,699.76) ; v1@575.14,798.08 v1@575.36,797.86 ; J3.B9@661.04,699.55 J3.B9@663.31,701.82
  Top Layer w12: C6.1@566,685.95 v1@566,699.8 ; v1@566.29,699.55 J3.A4 J3.B9@661.04,699.55 ; v1@575.36,797.86 J3.A9@613.27,797.86 ; J3.A9@619.88,798 J3.B4@661.58,798
  Top Layer w15: U1.6@548.99,780.56 548.99,790.56 v1@556.15,797.72 ; v1@556.54,797.6 v1(575.28,797.6)
  Signal Layer 1 w6: 412.32,606.33 414.29,606.33
  Signal Layer 1 w15: 219.49,791.64 v1@269.18,791.64 ; 414.29,606.33 445,637.04 v1(445,640)
  Signal Layer 1 w20: 550.47,806.66 549.07,805.27 521.8,777.99 521.8,727.19 549.23,699.76 v1(566.54,699.76)
  Signal Layer 1 w25: v1@575.39,795.95 J3.B4@662.87,795.95
  Signal Layer 1 w30: 431.2,578.75 334.52,675.43 300.37,675.43 219.49,756.31 219.49,791.64 219.49,838.25 273.24,892 466.45,892 563.33,795.13 v1@578.49,795.13 ; 431.95,578.48 500.2,578.48 623.62,455.06 ; 623.61,455 651.36,455
  Bottom Layer w6: Q1.5 411.05,580.92 429.65,562.32 v1@429.65,562.21 ; Q1.2 411.05,640.55 415.95,645.45 432.08,645.45 434.41,645.44 438.79,641.06 v1@447.61,641.06
  Bottom Layer w10: v1@618.47,457.72 623.08,453.11 633.96,453.11 644.57,463.73 U2.6@693.99,463.73 ; U2.5@693.99,438.14 742.19,438.14 771.09,409.24 C1.1@771.09,398.28
  Bottom Layer w12: C4.1@228.96,780.43 239.6,769.79 269.89,769.79 U3.19@325.95,769.8
  Bottom Layer w13: U2.5@693.99,438.14 U2.6@693.99,463.73
  Bottom Layer w15: C4.1@231.28,779.78 237.47,779.78 C4.1@239.65,781.96 ; C4.1@234.55,781.96 C4.1@239.65,781.96 ; v1@269.39,791.86 266.04,788.51 246.2,788.51 C4.1@239.65,781.96
  Bottom Layer w20: J3.B9@663.05,699.06 J3.B9
  other v1: 637.94,455.84 617.84,460.44 430,560 269.36,791.8 556.52,797.82 219.17,805.9
GND: C1.2 C2.2 C3.2 C4.2 C5.2 C6.2 C9.2 C10.2 J1.A1 J1.A12 J1.B1 J1.B12 J1.Shell J2.A1 J2.A12 J2.B1 J2.B12 J2.Shell J3.A1 J3.A12 J3.B1 J3.B12 J3.Shell Q2.1 Q2.4 R12.1 R16.1 R18.1 R20.1 U1.1 U2.4 U3.4 U3.17 U3.20 U3.24 U3.26 U3.33 | length 1673.1
  Top Layer w5: J3.B12@660.65,640.49 J3.B12@662.53,638.62 ; J3.B1@660.74,857.03 J3.B1@662.69,858.97
  Top Layer w6: v1@140.43,784.53 155.13,784.53 161.89,777.77 Q2.1 ; v1@163.74,702.47 163.74,704.61 194.76,735.63 Q2.4 ; J1.Shell@197.89,333.57 J1.Shell@198.08,333.38 ; J1.Shell@197.94,622.07 J1.Shell@199.48,620.53 ; J1.Shell@199.31,330.42 J1.Shell@202.92,326.81 ; R20.1@493.88,720.52 494.95,719.45 494.95,687.88 516.02,666.81 R18.1 566.48,666.81 C6.2@566.53,666.76 ; v1@509.22,809.72 510.15,808.79 527.48,826.12 C2.2 ; 523.27,795.67 523.37,795.67 ; v1@577.37,100.18 v1@577.72,100.52 ; J2.A1@605.49,100.1 J2.A1@605.71,99.87 ; J2.B12@661.44,100.1 J2.B12@664.28,97.26 ; J2.B1@661.57,316.63 J2.B1@663.36,318.42
  Top Layer w10: v1@510.15,808.79 523.27,795.67 U1.1@523.27,778.17 ; 523.37,795.67 547.87,820.16 562.04,820.16 576.57,834.69 576.57,850.27 583.24,856.94 J3.A12@606.77,856.94 ; v1(559.89,100.18) v1@577.37,100.18 ; C6.2 565.93,649.59 575.15,640.36 617.34,640.36 J3.A1@617.77,639.93 ; v1(579.04,100.1) J2.A1@605.49,100.1 ; v1(626.26,329.34) 626.26,317.91 J2.A12@627.01,317.16
  Top Layer w11: J2.A1 J2.B12@661.44,100.1 ; J2.A12 J2.B1@661.57,316.63
  Top Layer w12: J3.A1 J3.B12@660.65,640.49 ; J3.A12 J3.B1@660.74,857.03
  Top Layer w15: J1.A12@196.95,585.21 v1@234.63,585.21 ; J1.A12@197.83,586.89 J1.Shell@197.83,624.57 ; J1.Shell@197.94,622.07 v1(197.94,656.01) ; v1(198.08,295.7) J1.Shell@198.08,333.38 ; J1.Shell@198.54,325.5 J1.A1@198.54,363.18 ; J1.Shell@201.18,626.8 v1@230.07,626.8 ; J1.Shell@202.92,326.81 v1(230.89,326.81)
  Bottom Layer w5: J1.B12@189.67,367.38 J1.B12@194.6,362.45
  Bottom Layer w6: J1.B12@188.12,368.61 189.35,367.38 J1.B12@189.67,367.38 ; J1.B1@193.52,584.88 J1.B1@193.78,584.62 ; v1(300.76,862.54) 305.18,862.54 310.85,868.21 U3.24@322.61,868.21 ; U3.33@359.26,844.18 U3.33@359.74,844.66 ; U3.33@362.94,789.48 U3.33@363.04,789.58 ; U3.33@462.91,807.64 U3.33@464.43,809.17 ; U3.4 510.39,809.17 v1@510.54,809.01 ; v1@611.71,518.66 618.37,512 C10.2@627.16,512 ; v1@627.16,500.66 C10.2@627.16,512 ; C9.2@646.12,511.93 646.05,512 C10.2@627.16,512 ; v1@647.51,501.18 C9.2 ; U2.4@861.66,437.04 U2.4 886.24,437.31 901.14,452.22 R16.1@914.69,452.22 ; J3.Shell@896.12,580.56 J3.Shell@896.35,580.33
  Bottom Layer w10: J1.B1@193.78,584.62 v1(234.38,584.62) ; U3.20 U3.33@362.94,789.48 ; U3.33@359.74,844.66 U3.26 ; U3.33@464.43,809.17 U3.4 ; J3.Shell@896.35,580.33 896.35,545.86 R12.1@899.34,542.87
  Bottom Layer w11: C1.2@789.74,395.58 789.74,412.46 814.32,437.04 U2.4@861.66,437.04
  Bottom Layer w15: J1.Shell@197.93,627.45 v1@197.93,656.12 ; v1(198.08,295.7) J1.Shell@198.08,323.96 ; J1.B1@198.14,591.58 J1.Shell@198.14,620.24 ; J1.Shell@198.76,626.88 v1@230.44,626.88 ; J1.Shell@200.36,326.81 v1(230.89,326.81)
  Bottom Layer w20: J1.Shell@194.6,330.88 J1.B12@194.6,362.45 ; U2.4@861.2,436.04 861.07,435.91 861.07,406.62 J2.Shell@892.46,375.23
  other v1: 860.6,417.42 626.91,498.44 647.58,498.3 606.96,522.2 230.63,627.12 163.5,703.3 308.88,710.54 293.81,725.61 140.7,784.64 508.62,809.14
  other v2: 369.58,759.95 408.95,759.95 448.32,759.95 369.58,799.32 408.95,799.32 448.32,799.32 369.58,838.69 408.95,838.69 448.32,838.69
LDO_FB: R10.1 R11.1 R12.2 U2.1 | length 101
  Bottom Layer w5: R10.1@837.13,558.86 856.97,558.86 874.02,541.81 R12.2@882.13,541.81 ; R12.2@877.85,541.59 877.85,515.31 U2.1@878.81,514.35
  Bottom Layer w10: R10.1 833.02,580.11 R11.1@833.32,580.4
NetC5_1: C5.1 U3.16 | length 36.2
  Bottom Layer w5: U3.16@339.44,715.31 338.89,714.76 338.89,682.91 C5.1@341.42,680.37
NetD1_2: D1.2 R6.2 | length 86.3
  Top Layer w6: R6.2 278.2,640.23 307.05,611.39 ; 307.05,611.35 318.56,599.83 D1.2@325.53,599.83
NetD2_2: D2.2 R5.2 | length 79.8
  Top Layer w6: R5.2 289.09,696.1 313.77,671.42 D2.2@347.78,671.42
NetQ1_3: Q1.3 Q1.8 R4.1 | length 258.3
  Bottom Layer w5: Q1.8 Q1.8@422.87,615.11 ; Q1.8@422.09,614.33 Q1.8@422.87,615.11 ; Q1.8@424.83,617.07 Q1.3 ; 439.96,615.23 440.34,615.23 444.99,619.88 484.1,619.88 503.04,600.94 503.04,538.76 477.57,513.29 477.57,483.93 R4.1@463.28,469.64 ; 440.04,615.11 Q1.8@422.87,615.11
  Bottom Layer w6: R4.1@463.28,465.68 R4.1@463.28,469.64
NetQ1_6: Q1.6 Q1.7 R3.1 | length 80
  Bottom Layer w5: Q1.6 397.27,613.19 Q1.7@399.5,615.42
  Bottom Layer w6: R3.1@343.51,577.92 364.26,598.67 368.88,598.67 Q1.6
NetQ2_3: Q2.3 Q2.8 R6.1 | length 198.8
  Top Layer w6: 145.86,709.12 145.86,694.1 154.49,685.47 196.67,685.47 199.92,682.21 219.73,662.4 R6.1@260.03,662.4 ; 146.06,708.18 146.06,716.22 161.56,731.72 Q2.3@161.56,739.54 ; Q2.3 176.58,740.44 178.73,742.59 178.73,742.99 Q2.8
NetQ2_6: Q2.6 Q2.7 R5.1 | length 187.2
  Top Layer w6: Q2.7@178.44,766.92 179.52,768 Q2.6 194.76,778.38 199.5,783.12 250.17,783.12 272.72,760.57 272.72,726.48 259.34,713.1 259.34,695.66 R5.1@259.55,695.45
NetR9_1: R9.1 U2.2 | length 86.2
  Bottom Layer w10: U2.2 861.72,488.44 932.43,488.44 937.65,483.22 R9.1@937.65,475.17
NetR11_2: R11.2 SW1.2 | length 644.1
  Top Layer w6: SW1.2@484.2,883.75 505.3,904.85 561.91,904.85 v1@567.05,909.99
  Bottom Layer w6: v1@567.52,910.93 581.2,897.24 656.1,897.24 656.22,897.13 669.88,897.13 677.82,889.18 731.6,889.18 731.84,889.42 735.55,889.42 853.13,771.83 853.13,713.93 814.76,675.56 R11.2
  other v1: 567.52,911.24
NetR15_2: R15.2 U3.18 | length 43.4
  Bottom Layer w6: R15.2 326.41,750.21 U3.18@326.64,749.98
NetR16_2: R16.2 U2.3 | length 50.4
  Bottom Layer w6: U2.3@870.31,459.84 870.31,462.74 896.11,462.74 904.46,471.09 R16.2
RXD: R8.2 R13.2 U3.2 | length 693.9
  Signal Layer 1 w6: v1@554.24,841.57 555.04,842.37 v1(555.04,842.96) 567.26,842.96 567.22,843 572.9,848.68 572.9,867.87 587.41,882.38 692.92,882.38 726.98,848.31 726.98,639.6 698.29,610.9 635.58,610.9 624.36,599.69 v1(624.36,571.58)
  Bottom Layer w6: U3.2@491.31,848.86 505.86,848.86 513.34,841.37 v1@554.71,841.37 ; R13.2 593.92,567.29 R8.2@594.16,567.06 ; R8.2 R8.2@594.16,567.06 ; v1@623.95,570.86 620.14,567.06 R8.2@594.16,567.06
RXD_R: D5.4 Q1.4 R8.1 R14.1 | length 1128
  Bottom Layer w5: Q1.4 434.81,598.67 445,588.47 445,553.79 444.69,553.48 444.69,550.97 446.45,549.21 D5.4@462.17,549.21
  Bottom Layer w6: D5.4 462.42,511.39 438.04,487.02 438.04,461.54 457.95,441.64 470.51,441.64 576.78,547.91 R8.1@593.63,547.91 ; R14.1@491.68,920.33 525.68,920.33 562.15,883.86 667.59,883.86 673.27,878.18 702.1,878.18 763.51,816.77 763.51,566.26 745.8,548.55 R8.1
RXLED: C8.2 Q2.2 R19.1 U3.21 | length 345.4
  Top Layer w6: C8.2@126.19,821.02 116.85,821.02 113.33,817.5 113.33,757.9 124.05,747.19 R19.1 ; C8.2@126.88,821.3 127.06,821.13 143.33,821.13 146.33,824.13 259.28,824.13 v1@291.68,791.73 ; 145.77,745.92 154.07,754.22 Q2.2
  Bottom Layer w12: v1@292.24,790.47 310.93,809.17 U3.21
  other v1: 291.98,791.42
SBU1: J1.A8 R2.2 R4.2 | length 366.3
  Top Layer w6: J1.A8@188.88,506.47 289.27,506.47 375.79,419.96 v1(481.35,419.96) ; v1@480.75,418.61 482.26,418.61 R2.2@495.05,405.81
  Bottom Layer w6: v1@481.35,419.91 R4.2@494.31,432.86
SBU1_R: J2.A8 R2.1 | length 256.5
  Top Layer w5: R2.1@509.58,390.72 515.46,384.84 515.46,373.58 497.59,355.71 497.59,279.33 539.02,237.89 565.51,237.89 567.63,240.01 611.83,240.01 J2.A8
SBU2: J1.B8 R1.1 R3.2 | length 1816.3
  Top Layer w6: v1(351.87,551.74) 382.7,520.92 400.89,520.92 R1.1@411.48,510.32
  Signal Layer 1 w6: v1@298.66,279.98 299.93,281.26 v1(299.93,364.08)
  Bottom Layer w6: J1.B8 282.16,446.94 300.15,428.95 v1@300.15,364.66 ; v1(299.83,279.31) 299.83,246.55 533.82,12.57 737.19,12.57 759.68,35.05 759.68,378.67 729.69,408.66 545.24,408.66 528.38,391.79 487.6,391.79 465.85,413.54 465.85,417.75 408.81,474.79 408.81,477.61 351.94,534.49 v1@351.94,551.42 ; v1(351.87,551.74) 363.2,551.74 R3.2@370.83,544.1
SBU2_R: J2.B8 R1.2 | length 525.2
  Top Layer w6: R1.2 475.01,496.12 626.26,344.87 695.85,344.87 721.08,319.63 721.08,204.28 J2.B8@692.16,175.36
SSRX1_N: J1.B10 J2.B10 | length 775.2
  Bottom Layer w5: J1.B10 220.88,407.57 225.72,402.72 252.18,402.72 270.85,384.05 270.85,356.86 346.89,280.82 351.04,276.67 cw(c359.88,267.83) 368.71,259 386.39,241.32 cw(c395.23,232.48) 404.07,223.64 421.75,205.96 554.04,73.67 677.44,73.67 690.43,86.65 693.35,89.58 707.88,89.58 712.56,94.26 712.56,123.53 J2.B10
SSRX1_P: J1.B11 J2.B11 | length 772.1
  Signal Layer 1 w5: v1@733.67,113.88 v1@734.2,113.35
  Signal Layer 2 w5: J2.B11 v1@733.67,113.88
  Bottom Layer w5: J1.B11 220.88,387.88 225.72,392.72 248.04,392.72 260.85,379.91 260.85,352.72 549.9,63.67 681.59,63.67 697.5,79.58 712.02,79.58 734.26,101.82 734.26,111.41 v1@736.66,113.81
  other v1: 733.38,112.98
SSRX2_N: J1.A10 J2.A10 | length 604.5
  Top Layer w5: J1.A10 220.88,545.36 225.17,549.65 301.12,549.65 398.32,452.46 481.34,452.46 542.54,391.26 542.54,350.19 530.71,338.36 530.71,308.8 551.76,287.75 577.21,287.75 ; 577.43,287.66 587.82,277.26 J2.A10
SSRX2_P: J1.A11 J2.A11 | length 599.4
  Top Layer w5: J1.A11 220.88,565.05 226.27,559.65 305.27,559.65 402.46,462.46 485.48,462.46 552.54,395.4 552.54,346.05 540.96,334.47 540.96,314.29 557.44,297.82 586.54,297.82 ; 587.12,297.66 587.82,296.95 J2.A11
SSTX1_N: J1.A3 J2.A3 | length 603.1
  Top Layer w5: J1.A3 220.88,407.57 225.72,402.72 250.01,402.72 275.08,377.65 275.08,270.15 410.6,134.63 582.98,134.63 587.82,139.47 J2.A3
SSTX1_P: J1.A2 J2.A2 | length 603.1
  Top Layer w5: J1.A2 220.88,387.88 225.72,392.72 245.86,392.72 265.08,373.51 265.08,266.01 406.46,124.63 582.98,124.63 587.82,119.78 J2.A2
SSTX2_N: J1.B3 J2.B3 | length 696.7
  Bottom Layer w5: J1.B3 220.88,545.36 225.72,550.2 293.31,550.2 495.87,347.65 565.99,347.65 590.99,347.65 ccw(c603.49,347.65) 615.99,347.65 640.99,347.65 665.99,347.65 667.1,347.65 686.65,328.09 702.93,328.09 718.09,312.93 718.09,301.53 690.72,274.15 J2.B3
SSTX2_P: J1.B2 J2.B2 | length 709.7
  Signal Layer 2 w5: J2.B2 v1@739.5,302.85
  Bottom Layer w5: J1.B2 220.88,565.05 225.72,560.2 297.46,560.2 500.01,357.65 671.24,357.65 690.79,338.09 707.07,338.09 739.5,305.66 v1@739.5,302.85
  other v1: 737.86,302.83
TXD: R7.2 R14.2 U3.30 | length 315.6
  Bottom Layer w5: R7.2@221.5,854.11 221.5,856.07 233.61,868.19 241.34,868.19 295.22,922.07 419.69,922.07 438.48,903.28 U3.30
  Bottom Layer w6: 438.77,903.3 455.91,920.44 R14.2
TXD_R: D5.1 Q1.1 R7.1 R13.1 | length 607.4
  Bottom Layer w5: R7.1@218.72,836.53 196.87,814.68 196.87,697.65 263.38,631.14 Q1.1@396.92,631.14 ; Q1.1@397.36,631.39 397.36,650.49 403.28,656.41 495.28,656.41 537.22,614.46 D5.1
  Bottom Layer w6: D5.1 551.17,600.27 564.71,586.73 R13.1@570.52,586.73
TXLED: C7.2 Q2.5 R17.1 U3.22 | length 570.8
  Top Layer w6: Q2.5 202.2,754.22 211.33,745.1 218.53,745.1 218.53,738.65 218.48,738.6 218.48,726.33 214.76,722.61 208.2,722.61 201.78,716.19 201.78,698.38 214.86,685.3 221.46,678.71 285.73,678.71 306.63,657.81 306.63,644.33 313.71,637.25 369.83,637.25 374.38,641.8 374.38,705.5 334.27,745.61 334.27,786.56 v1@291.63,829.2 ; R17.1@218.49,745.57 238.98,745.57 C7.2@239.09,745.46
  Bottom Layer w12: v1@290.54,828.85 U3.22
  other v1: 291.93,829.19
USB_FT_HS_N: J3.A6 J3.B6 U1.4 U3.14 | length 452.1
  Top Layer w5: v1@569.2,744.74 v1@571.52,747.06 ; v1@572.29,746.68 574.87,746.68 582.83,738.73 J3.A6@614.37,738.73
  Top Layer w10: U1.4 v1@569.2,744.74
  Signal Layer 1 w5: J3.B6@655.82,771.9 J3.B6@663.32,764.4
  Bottom Layer w5: U3.14 379.43,704.3 374.58,699.46 374.58,691.25 381.69,684.15 511.79,684.15 527.18,699.54 527.18,721.97 549.68,744.47 571.54,744.47 v1@572.18,743.83 ; v1(572.8,744.69) 593.71,744.69 598.19,740.21 ; 598.5,740.14 638.68,740.14 J3.B6
  Bottom Layer w12: J3.B6 J3.B6@666.07,761.48
USB_FT_HS_P: J3.A7 J3.B7 U1.5 U3.15 | length 504.3
  Top Layer w5: U1.5 U1.5@549.3,760.05 ; J3.A7 639.31,758.6 663.62,734.29 J3.B7@663.62,732.48
  Top Layer w10: U1.5@549.3,760.05 563.41,760.05 565.55,762.19 580.05,762.19 582.18,760.05 582.6,760.05 584.37,758.28 J3.A7@615.89,758.28
  Bottom Layer w5: U3.15 359.74,704.3 364.58,699.46 364.58,687.11 377.55,674.15 515.93,674.15 537.18,695.4 537.18,717.83 549.06,729.71 566.56,729.71 ; 566.58,729.69 579.01,729.69 ; 579.03,729.71 659.75,729.71 J3.B7
USBC_HS_N: J1.A7 J2.A7 J2.B7 | length 618.2
  Top Layer w5: v1(573.84,225.01) 580.64,218.21 J2.A7
  Bottom Layer w5: v1@223.68,486.67 228.89,481.46 244.93,481.46 254.42,471.98 299.22,471.98 458.34,312.85 486.24,312.85 501.16,297.93 501.16,280.65 564.4,217.41 569.04,217.41 v1@572.95,221.32 ; v1(573.84,225.01) 606.23,192.62 J2.B7
  other v1: 222.5,486.56
USBC_HS_P: J1.A6 J2.A6 J2.B6 | length 617.9
  Top Layer w5: v1(570,200) 585.98,200 587.36,198.62 ; 587.82,198.52 J2.A6 637.57,198.52 J2.B6
  Bottom Layer w5: v1@220.88,466.62 221.12,466.86 245.4,466.86 250.28,461.98 295.08,461.98 324.76,432.29 342.44,414.62 ccw(c351.28,405.78) 360.12,396.94 377.79,379.26 ccw(c386.63,370.42) 395.47,361.58 413.15,343.91 ccw(c421.99,335.07) 430.83,326.23 448.51,308.55 451.7,305.36 454.2,302.85 482.09,302.85 491.16,293.79 491.16,276.51 560.5,207.17 565.17,207.17 570,202.34 v1(570,200)
  other v1: 223.38,466.56
VBUS_C: J1.A4 J1.A9 J1.B4 J1.B9 J2.A4 J2.A9 J2.B4 J2.B9 | length 870.9
  Top Layer w12: 573.24,159.15 J2.A4 J2.B9@661.39,159.15 ; 576.81,257.58 J2.A9
  Top Layer w13: J1.A4@189.17,426.94 v1@243.55,426.94
  Top Layer w14: J1.A9 241.17,525.68
  Top Layer w15: v1@242.68,427.06 262.86,427.06 273.83,416.08 ; 274.17,415.81 v1@283.58,415.81 ; v1@528.1,172.21 541.16,159.15 573.24,159.15 ; J2.B9@661.39,159.15 J2.B9@663.28,161.05
  Top Layer w20: 241.17,525.92 v1@258.89,525.92 ; v1@261.09,525.79 v1@279.32,525.79 ; v1@537.88,270.26 550.56,257.58 576.81,257.58
  Signal Layer 1 w15: v1@520.93,178.73 538.54,161.12 J2.B9 J2.B9@661.12,159.08 ; 542.66,255.61 J2.B4
  Bottom Layer w14: J1.B9 J1.B9 v1@243.55,427.34 ; J1.B4 J1.B4@188.96,525.78 ; J1.B4@190.27,525.85 v1@279.22,525.85
  Bottom Layer w15: v1@243.49,426.69 264.9,426.69 275.61,415.99 v1@282.77,415.99
  other v1: 540.02,160.48 525.9,174.27 550.01,258.13 536.5,271.23 283.54,416.13 242.53,427.26 263.74,426.98 227.84,525.33 253.91,526.1 278.39,525.96
VSBU: C2.1 C7.1 C8.1 C9.1 C10.1 D5.3 D5.6 R9.2 R10.2 R17.2 R19.2 SW1.1 U2.7 U2.8 U3.1 | length 2323.2
  Top Layer w6: C8.1@127.59,801.82 127.59,801.7 126.12,800.23 126.12,792.14 124.82,790.84 124.82,770.22 128.33,766.7 138.45,766.7 R19.2 ; C8.1@132.88,802.84 v1(174.83,802.84) ; v1(221.28,700.8) 230.13,700.8 261.11,731.78 261.11,758.04 255.88,763.27 239.15,763.27 238.42,764.01 R17.2@224.82,764.01 ; C2.1 C2.1@529.55,852.01 ; v1@545.65,868.11 v1@547.5,868.11 ; v1@741.99,488.65 798.43,488.65 807.83,479.25 807.83,441.27 813,436.1 915.67,436.1 v1@918.95,432.82
  Top Layer w10: C2.1@529.55,852.01 v1@545.65,868.11
  Top Layer w15: SW1.1@181.82,878.48 207.99,904.65 v1@221.55,904.65
  Signal Layer 1 w30: 541.63,872.86 483.69,930.81 249.72,930.81 174.49,855.58 174.49,738.85 276.18,637.17 312.8,637.17 417.47,532.5 441.39,532.5 444.42,535.53 485.21,535.53 604.57,416.17 707.81,416.17 743.09,451.45 v1@743.09,512.11
  Bottom Layer w6: D5.3@537.55,549.4 D5.3@537.66,549.28 ; v1@547.54,868.26 v1@548.06,867.73 ; C9.1@647.52,530.5 C9.1@647.66,530.37 ; U2.8@674.33,514.59 U2.8@697.66,514.59
  Bottom Layer w8: U2.8@698.13,514.35 744.06,514.35 788.97,559.25 R10.2
  Bottom Layer w10: D5.6@462.5,600.42 476.52,600.42 485.83,591.11 v1(485.83,544.92) ; 502.1,868.26 v1@547.54,868.26 ; v1(507.47,512.76) 519.11,524.4 525.89,524.4 537.66,536.17 D5.3@537.66,549.28 ; C10.1@627.16,530.5 C9.1@647.52,530.5 ; C9.1 658.32,530.61 U2.8@674.33,514.59 ; U2.7@693.61,488.73 U2.7@696.31,488.73 ; U2.7 U2.7@696.31,488.73 ; U2.8@696.37,514.12 U2.8 U2.7@696.31,488.73 ; v1(742.64,488.73) U2.7@696.31,488.73 ; v1@917.95,432.82 928.13,432.82 937.33,442.01 937.33,453.99 R9.2@937.85,454.51
  other v1: 918.43,433.27 742.43,513.15 547.74,867.8 221.53,904.78
pads on no net: D5.2 D5.5 J2. J3. J3.A2 J3.A3 J3.A8 J3.A10 J3.A11 J3.B2 J3.B3 J3.B8 J3.B10 J3.B11 U1.2 U1.3 U3.3 U3.5 U3.6 U3.7 U3.8 U3.9 U3.10 U3.11 U3.12 U3.13 U3.23 U3.25 U3.27 U3.28 U3.29 U3.31 U3.32
copper on no net: | length 0.3
  Top Layer w6: 535.21,685.15 535.43,684.93
  other v1: 288.95,591.26

## Polygon pours and split planes (outlines as drawn)
GND on Signal Layer 1 "Signal Layer 1-GND" (solid, pour order 6): 100.35,954.93 994.17,955.22 994.17,0.25 100.35,-0.03
VBUS_C on Signal Layer 1 "Signal Layer 1-VBUS_C" (solid, pour order 4): 245.99,536.66 245.94,419.14 269.48,419.14 538.18,150.43 557.18,150.43 557.18,267.72 288.78,536.66
GND on Signal Layer 2 "Signal Layer 2-GND" (solid, pour order 2): 100.3,955.47 100.02,-0.18 994.11,-0.18 994.17,955.47
GND on Bottom Layer "Bottom Layer-GND" (solid, pour order 8): 256.27,755.62 265.07,764.41 355.45,764.41 355.45,683.31 234.46,683.05 234.46,750.16

## Silkscreen, mask and mechanical layers (free items; w line width, h text height)
Top Overlay:
  text "3V3" at 134.54,908.37 h30
  text "1V8" at 464.67,908.37 h30
  text "RX" at 442.08,654.02 h40
  text "TX" at 440.73,581.2 h40
  text "go/droid-cereal" at 555.38,207.09 h30 r136.85
Bottom Overlay:
  lines w10: 930.53,440.78 938.47,432.85 938.47,338.98
Mechanical 13:
  the board outline again, w3
Drill Drawing:
  drawing of 334 lines, arcs and shapes, not listed
  text "Layer" at -922.5,2691.36 h60
  text "Name" at -512.59,2691.36 h60
  text "Material" at 427.15,2691.36 h60
  text "Thickness" at 1286.92,2691.36 h60
  text "Constant" at 1936.76,2691.36 h60
  text "Board Layer Stack" at 2506.62,2691.36 h60
  text "Top Overlay" at -512.59,2571.36 h60
  text "Top Solder" at -512.59,2451.36 h60
  text "Solder Resist" at 427.15,2451.36 h60
  text "0.40mil" at 1286.92,2451.36 h60
  text "3.5" at 1936.76,2451.36 h60
  text "1" at -922.5,2331.36 h60
  text "Top Layer" at -512.59,2331.36 h60
  text "Copper" at 427.15,2331.36 h60
  text "1.38mil" at 1286.92,2331.36 h60
  text "Differential Impedance: 90 Ohm - 5 mil" at 3650.11,2325.74 h60
  text "Dielectric 1" at -512.59,2211.36 h60
  text "FR-4" at 427.15,2211.36 h60
  text "4.33mil" at 1286.92,2211.36 h60
  text "4.2" at 1936.76,2211.36 h60
  text "2" at -922.5,2091.36 h60
  text "Signal Layer 1" at -512.59,2091.36 h60
  text "Copper" at 427.15,2091.36 h60
  text "1.38mil" at 1286.92,2091.36 h60
  text "FR-4" at -512.59,1971.36 h60
  text "7.87mil" at 1286.92,1971.36 h60
  text "4.2" at 1936.76,1971.36 h60
  text "3" at -922.5,1851.36 h60
  text "Signal Layer 2" at -512.59,1851.36 h60
  text "Copper" at 427.15,1851.36 h60
  text "1.38mil" at 1286.92,1851.36 h60
  text "Dielectric 2" at -512.59,1731.36 h60
  text "4.33mil" at 1286.92,1731.36 h60
  text "4.2" at 1936.76,1731.36 h60
  text "4" at -922.5,1611.36 h60
  text "Bottom Layer" at -512.59,1611.36 h60
  text "Copper" at 427.15,1611.36 h60
  text "1.38mil" at 1286.92,1611.36 h60
  text "Differential Impedance: 90 Ohm - 5 mil" at 3650.11,1586.08 h60
  text "Bottom Solder" at -512.59,1491.36 h60
  text "Solder Resist" at 427.15,1491.36 h60
  text "0.40mil" at 1286.92,1491.36 h60
  text "3.5" at 1936.76,1491.36 h60
  text "Bottom Overlay" at -512.59,1371.36 h60
  text "Symbol" at -1121.57,-527.08 h72
  text "Count" at -615.69,-527.08 h72
  text "Hole Size" at -45.84,-527.08 h72